# Altium PCB UFC-PCB.PcbDoc
Units mm, origin at the board's own origin, x right, y up, seen from the top; angles counter-clockwise.
Board outline 94.62 x 100 mm, 2 copper layers (Top Layer, Bottom Layer), stack 1.571 mm thick; 29 components, 27 nets, 157 pads, 0 vias.
Unrouted connection lines stored in the file: 39.
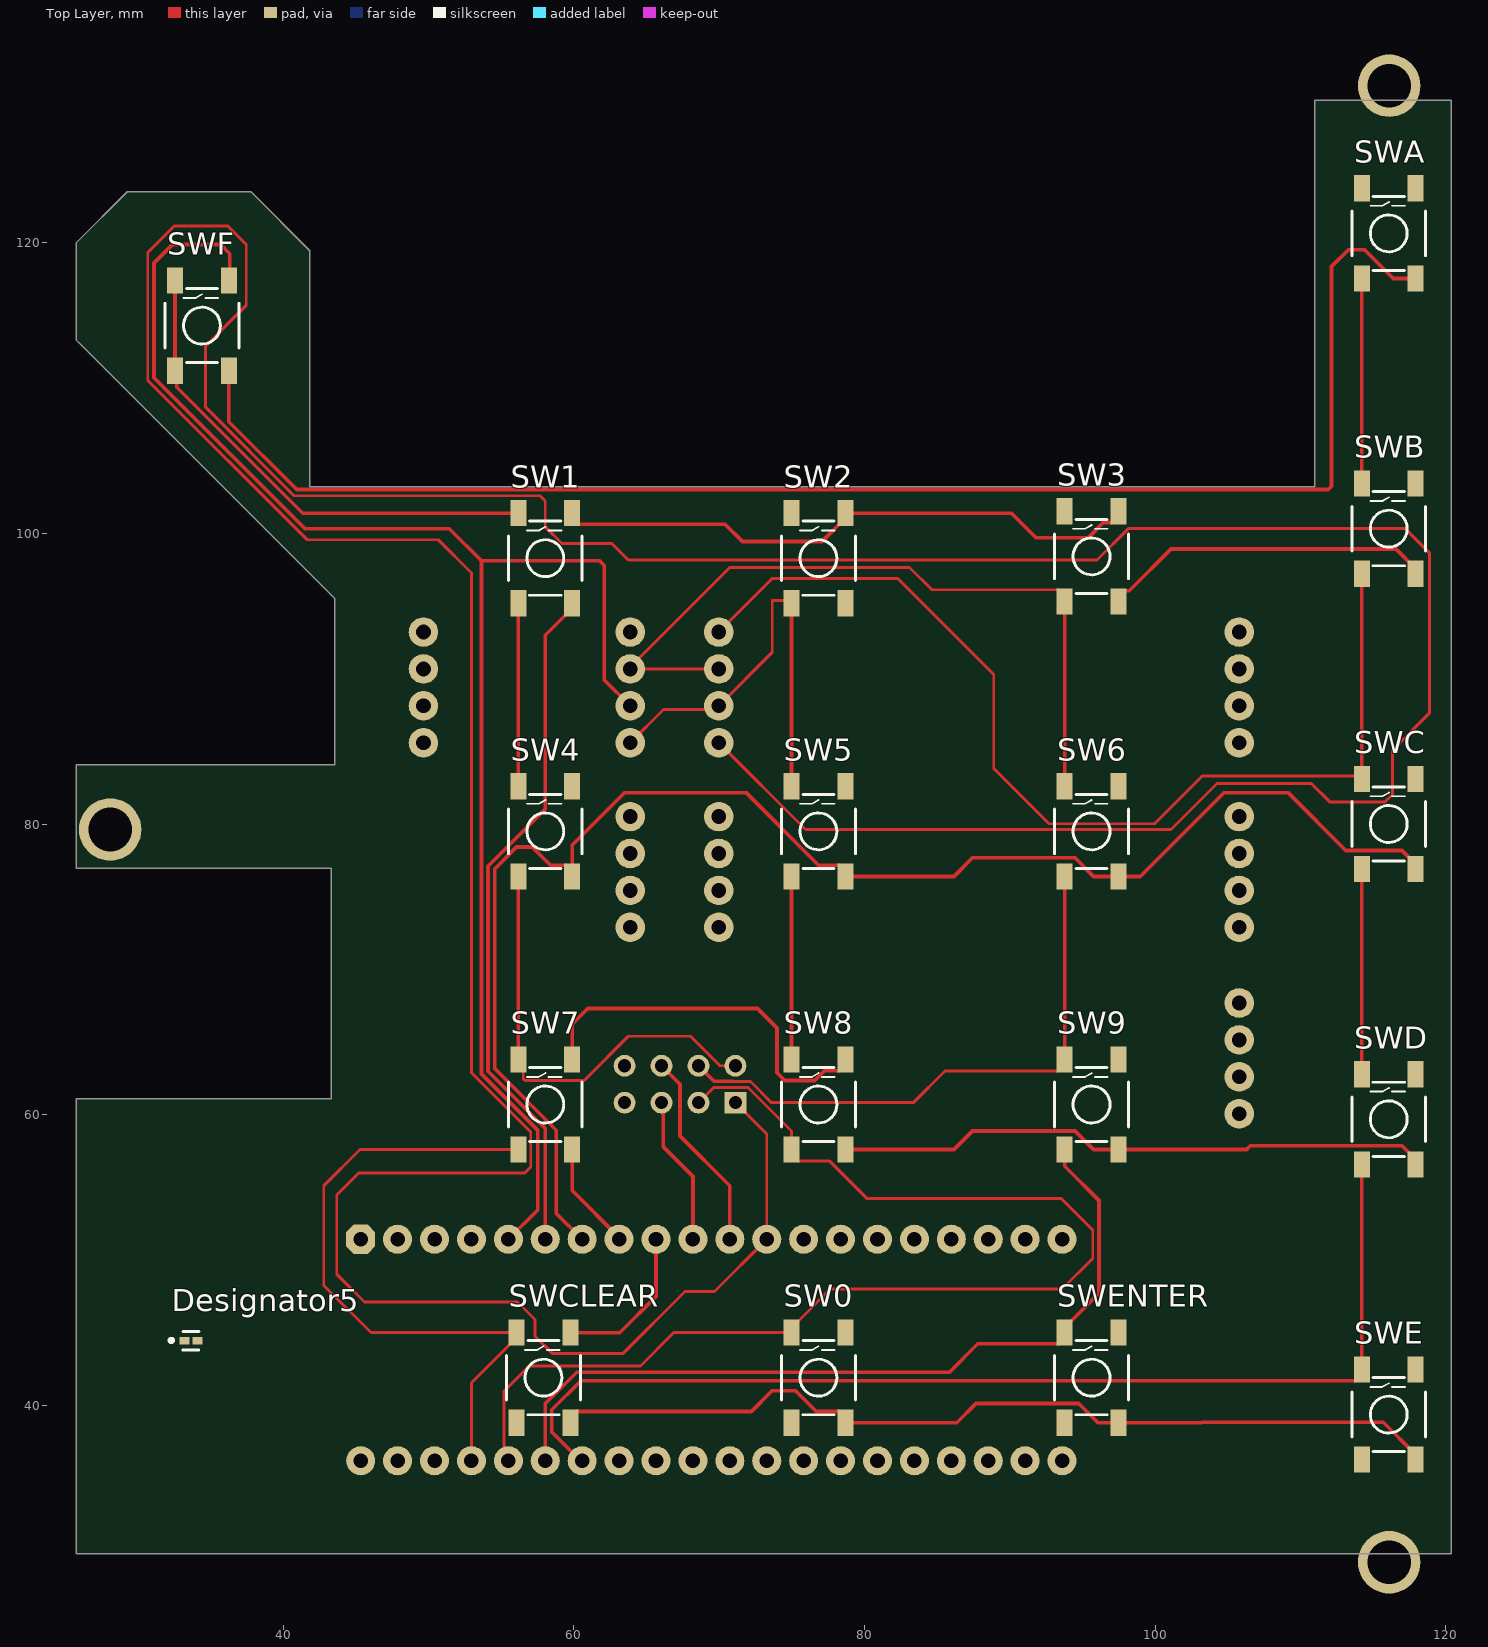
[diagram p0: Top Layer view]
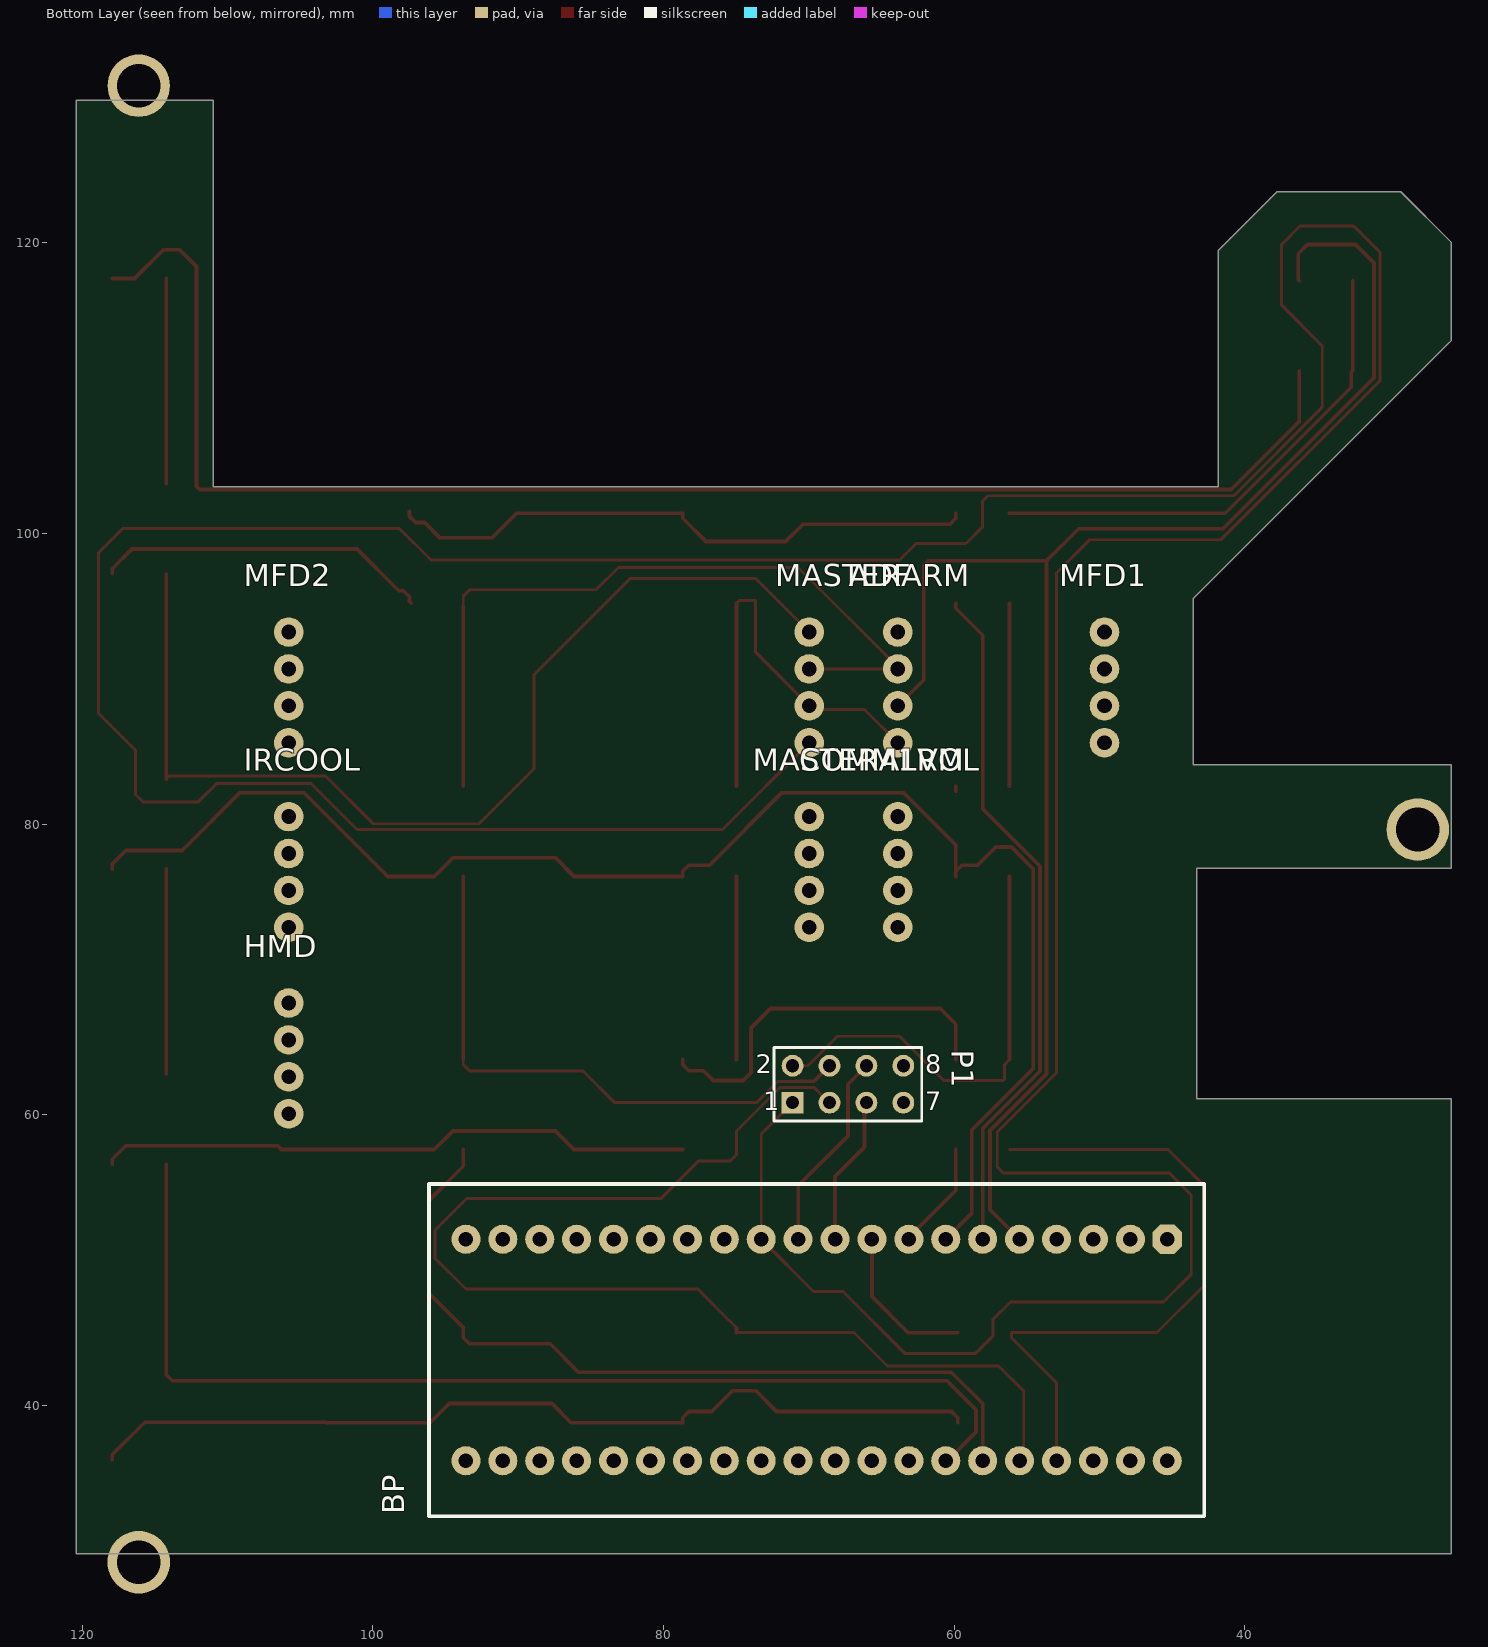
[diagram p1: Bottom Layer view, seen from below]
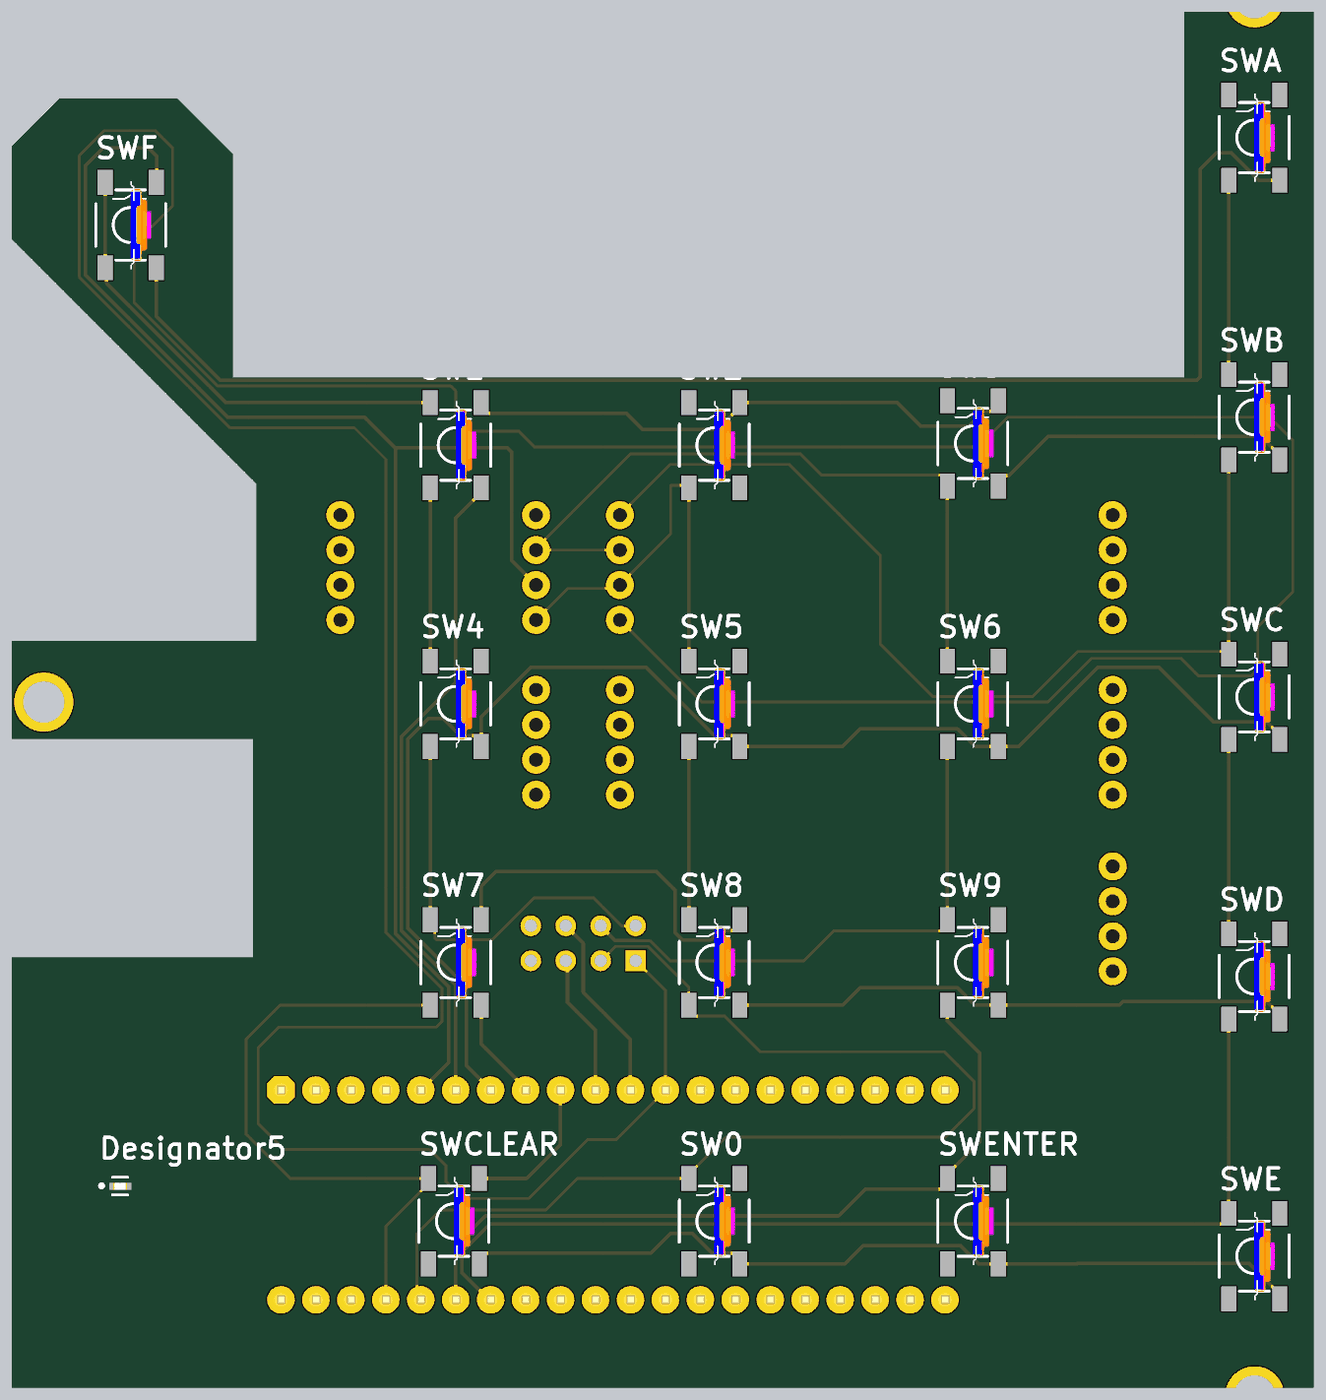
[diagram p2: 3D render of the assembled board from above, using the file's embedded part models]
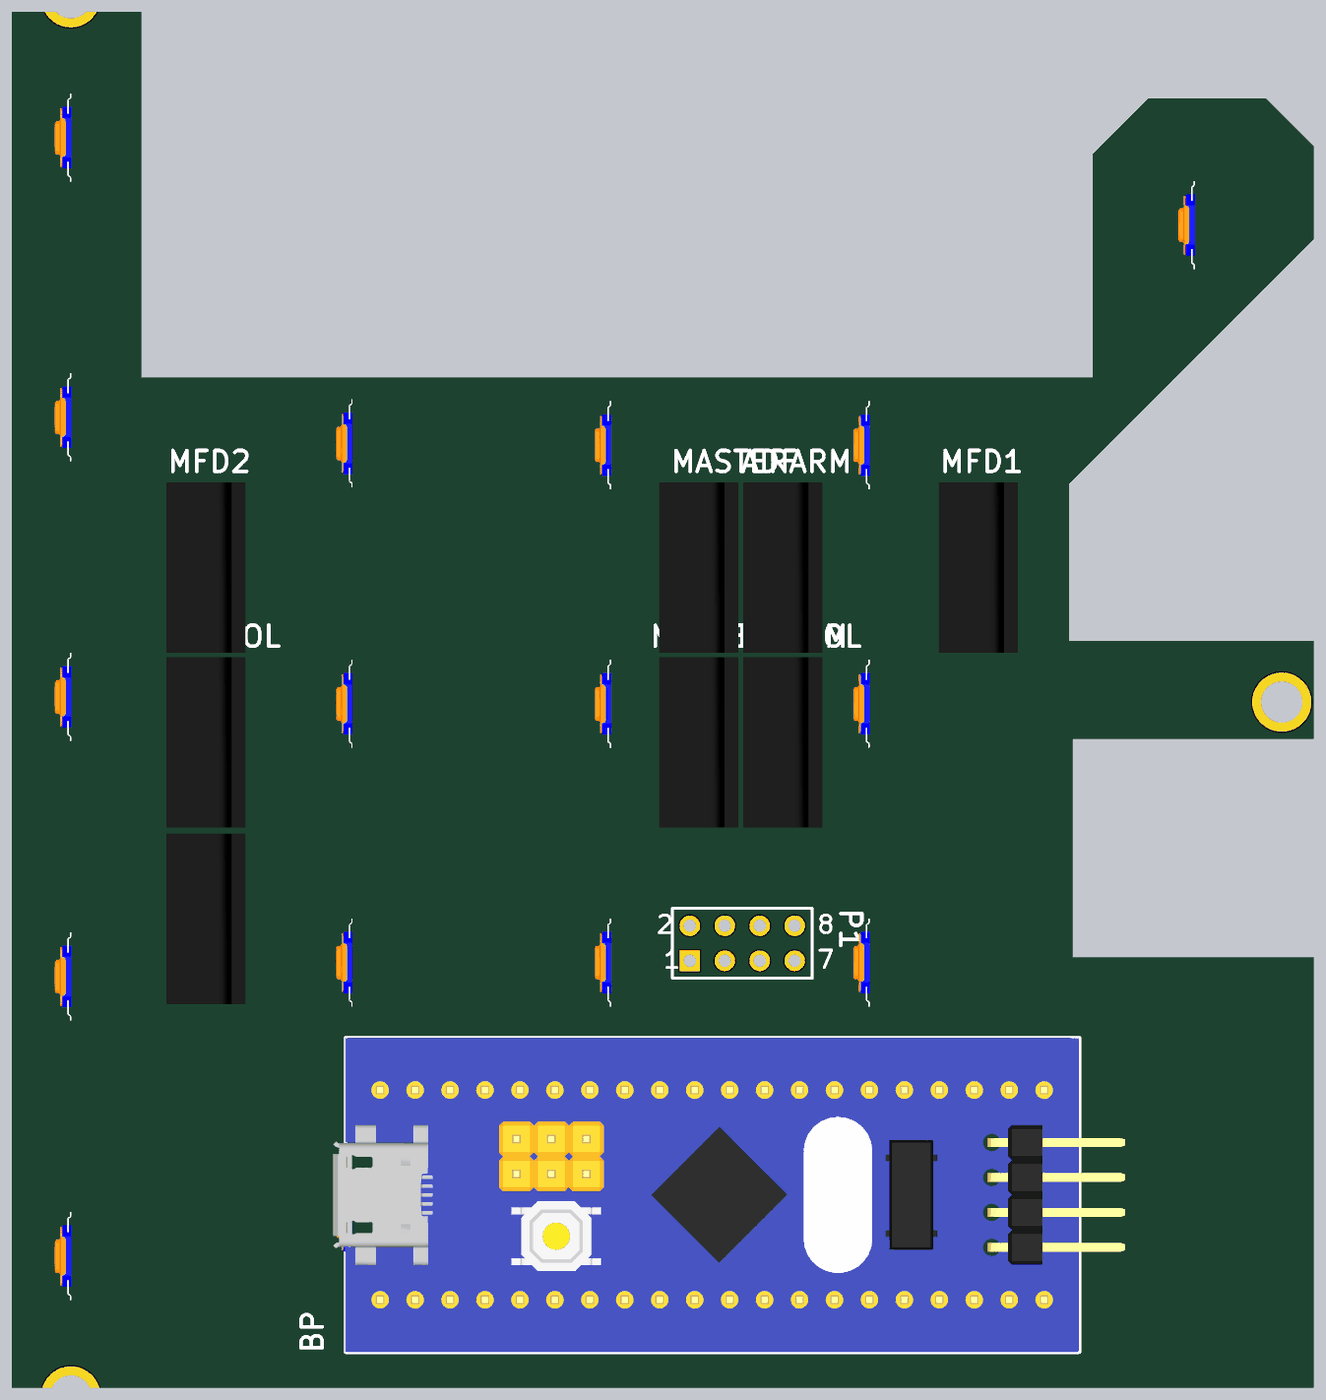
[diagram p3: 3D render of the assembled board from below, using the file's embedded part models]

## Layer stack, top to bottom
Top Solder: solder mask 0.0102, Solder Resist, Dk 3.5
Top Layer: signal copper 0.0356
Dielectric 1: dielectric 1.5, FR-4, Dk 4.8
Bottom Layer: signal copper 0.0356
Bottom Solder: solder mask 0.0102, Solder Resist, Dk 3.5

## Board outline
25.781,29.8 25.781,61.087 43.307,61.087 43.307,76.962 25.781,76.962 25.781,84.074 43.561,84.074 43.561,95.504 26.035,113.03 25.781,113.284 25.781,120.015 29.273,123.507 37.783,123.507 41.839,119.451 41.839,103.203 110.998,103.203 110.998,129.8 120.396,129.8 120.396,29.8

## Design rules (kind name [scope] priority, off if disabled: settings)
Clearance [All] p1: gap=0.2 ignorepadtopadclearanceinfootprint=FALSE
ComponentClearance [IsFree] p1: gap=0 collisioncheckmode=3 verticalgap=0 showdistances=FALSE
ComponentClearance ComponentClearance_1 [All] p2: gap=0.254 collisioncheckmode=3 verticalgap=0.254 showdistances=FALSE
PolygonConnect [All] p1: connectstyle=Relief reliefconductorwidth=0.254 reliefentries=4 polygonreliefangle="90 Angle" airgapwidth=0.254
RoutingVias [All] p1: holewidth=0.711 width=1.27 viastyle="Through Hole" minholewidth=0.711 minwidth=1.27 maxholewidth=0.711 maxwidth=1.27
SolderMaskExpansion [All] p1: expansion=0.102 istentingtop=FALSE
Width [All] p1: maxlimit=0.254 minlimit=0.2 preferedwidth=0.254
29 further rules are at their usual default settings.

## Components (designator, comment, footprint, x,y, rotation, side; value= is the part's Value field where it differs from the comment)
ADF "B4B-XH-A(LF)(SN)" "New footprint 1" 64.389,89.408 r90 bottom
BP "BLUEPILL STM32F103" BLUEPILL-PCB 45.339,51.435 r90 bottom
COMM1VOL "B4B-XH-A(LF)(SN)" "New footprint 1" 64.389,76.708 r90 bottom
Designator5 "Comment" FP-APHHS1005CGCK-MFG 33.655,44.45 r0 top
HMD "B4B-XH-A(LF)(SN)" "New footprint 1" 106.299,63.881 r90 bottom
IRCOOL "B4B-XH-A(LF)(SN)" "New footprint 1" 106.299,76.708 r90 bottom
MASTERALRM "B4B-XH-A(LF)(SN)" "New footprint 1" 70.485,76.708 r90 bottom
MASTERARM "B4B-XH-A(LF)(SN)" "New footprint 1" 70.485,89.408 r90 bottom
MFD1 "B4B-XH-A(LF)(SN)" "New footprint 1" 50.165,89.408 r90 bottom
MFD2 "B4B-XH-A(LF)(SN)" "New footprint 1" 106.299,89.408 r90 bottom
P1 "Header 4X2" HDR2X4 71.12,60.833 r180 bottom
SW0 "95C05B3GWRT" TACTILE-SWITCH-4P 76.835,41.91 r90 top
SW1 "95C05B3GWRT" TACTILE-SWITCH-4P 58.039,98.298 r90 top
SW2 "95C05B3GWRT" TACTILE-SWITCH-4P 76.835,98.298 r90 top
SW3 "95C05B3GWRT" TACTILE-SWITCH-4P 95.631,98.425 r90 top
SW4 "95C05B3GWRT" TACTILE-SWITCH-4P 58.039,79.502 r90 top
SW5 "95C05B3GWRT" TACTILE-SWITCH-4P 76.835,79.502 r90 top
SW6 "95C05B3GWRT" TACTILE-SWITCH-4P 95.631,79.502 r90 top
SW7 "95C05B3GWRT" TACTILE-SWITCH-4P 58.039,60.706 r90 top
SW8 "95C05B3GWRT" TACTILE-SWITCH-4P 76.835,60.706 r90 top
SW9 "95C05B3GWRT" TACTILE-SWITCH-4P 95.631,60.706 r90 top
SWA "95C05B3GWRT" TACTILE-SWITCH-4P 116.078,120.65 r90 top
SWB "95C05B3GWRT" TACTILE-SWITCH-4P 116.078,100.33 r90 top
SWC "95C05B3GWRT" TACTILE-SWITCH-4P 116.078,80.01 r90 top
SWCLEAR "95C05B3GWRT" TACTILE-SWITCH-4P 57.912,41.91 r90 top
SWD "95C05B3GWRT" TACTILE-SWITCH-4P 116.078,59.69 r90 top
SWE "95C05B3GWRT" TACTILE-SWITCH-4P 116.078,39.37 r90 top
SWENTER "95C05B3GWRT" TACTILE-SWITCH-4P 95.631,41.91 r90 top
SWF "95C05B3GWRT" TACTILE-SWITCH-4P 34.417,114.3 r90 top

## Footprints (in the part's own frame and the unit in brackets; to place one, negate y for a bottom-side part, rotate by r counter-clockwise, add the part's x,y. Pads: shape width x height; smd on the part's side, far side on the other; paste and mask are expansions set on the pad)
BLUEPILL-PCB [mm]
  oct 2x2 hole 1: 1(0,0)
  round 2 hole 1: 2(0,2.54) 3(0,5.08) 4(0,7.62) 5(0,10.16) 6(0,12.7) 7(0,15.24) 8(0,17.78) 9(0,20.32) 10(0,22.86) 11(0,25.4) 12(0,27.94) 13(0,30.48) 14(0,33.02) 15(0,35.56) 16(0,38.1) 17(0,40.64) 18(0,43.18) 19(0,45.72) 20(0,48.26) 21(-15.24,48.26) 22(-15.24,45.72) 23(-15.24,43.18) 24(-15.24,40.64) 25(-15.24,38.1) 26(-15.24,35.56) 27(-15.24,33.02) 28(-15.24,30.48) 29(-15.24,27.94) 30(-15.24,25.4) 31(-15.24,22.86) 32(-15.24,20.32) 33(-15.24,17.78) 34(-15.24,15.24) 35(-15.24,12.7) 36(-15.24,10.16) 37(-15.24,7.62) 38(-15.24,5.08) 39(-15.24,2.54) 40(-15.24,0)
  silkscreen extent -19.05,-2.54 3.8,50.8, body extent -19.05,-5.84 12.45,51.72, height 18.27
FP-APHHS1005CGCK-MFG [mm]
  rect 0.7x0.5 smd paste+0 mask+0: 1(-0.45,0) 2(0.45,0)
  silkscreen extent -1.47,-0.63 0.55,0.65, body extent -0.9,-0.4 0.9,0.4, height 0.25
HDR2X4 [mm] "Connector; Header; 4x2 Position"
  rect 1.5x1.5 hole 0.9: 1(0,0)
  round 1.5 hole 0.9: 2(0,2.54) 3(2.54,0) 4(2.54,2.54) 5(5.08,0) 6(5.08,2.54) 7(7.62,0) 8(7.62,2.54)
  silkscreen extent -1.27,-1.27 8.89,3.81
"New footprint 1" [mil]
  round 80 hole 40: 1(-150,-20) 2(-50,-20) 3(50,-20) 4(150,-20)
  body extent -244,-114 244,113, height 276
TACTILE-SWITCH-4P [mm]
  rect 1.8x1.1 smd: 1(-3.1,1.85) 2(-3.1,-1.85) 3(3.1,1.85) 4(3.1,-1.85)
  silkscreen extent -2.55,-2.54 2.55,2.54, body extent -3.2,-2.6 3.2,2.6, height 1.5

## Part data
ADF COMM1VOL HMD IRCOOL MASTERALRM MASTERARM MFD1 MFD2: library part B4B-XH-A(LF)(SN)-1, "JST (JAPAN SOLDERLESS TERMINALS) - B4B-XH-A (LF)(SN) - Wire-To-Board-Steckverbinder, vertikal, 2.5 mm, 4 Kontakt(e), Stiftleiste, Baureihe XH", Color=Natural, Contact Resistance=20mR, Current Rating=3A, Housing Color=White, Insulation Resistance=1GR, Max Operating Temperature=85°C, Max Voltage Rating (AC)=250V, Min Operating Temperature=-25°C, Package Quantity=500, Connector Type="Male Pin", Contact Material=Brass, Contact Plating=Tin,Copper,Lead, Depth=5.75mm, Gender=Male, Housing Material=Polyamide, Lead Free="Lead Free", Lead Pitch=2.5mm, Length=12.4mm, Material=Polyamide, Max Current Rating=3A, Max Voltage Rating (DC)=250V, Mount="Through Hole", Number of Contacts=4, Number of Positions=4, Number of Rows=1, Orientation=Straight, Packaging=Bulk, Pitch=2.5mm, REACH SVHC="No SVHC", Termination=Press-Fit, Voltage Rating=250V, Voltage Rating (AC)=250V, Wire/Cable Gauge=22AWG
BP: library part BLUEPILL-1, "STM32 Blue Pill Development Module"
P1: "Header, 4-Pin, Dual row", LatestRevisionDate=17-Jul-2002, LatestRevisionNote="Re-released for DXP Platform.", Publisher="Altium Limited"
SW0 SW1 SW2 SW3 SW4 SW5 SW6 SW7 SW8 SW9 SWA SWB SWC SWCLEAR SWD SWE SWENTER SWF: library part 95C05B3GWRT-4, "SWITCH TACTILE SPST-NO 0.05A 12V", Cod EMS=05.283.001.096, Part No=95C05B3GWRT

## Free pads (board coordinates)
  round 4.3 hole 3: 1(28.099,79.629) 1(116.11,130.81)
  round 4.305 hole 3: 1(116.11,29.21)

## Nets (pads, with @x,y where several pads share a name; then routed paths per layer and width w, separated by ;. In a path a pad name is that pad's centre, name@x,y a point inside that pad or via, vN(x,y) a via of type N, cw(c..) or ccw(c..) an arc to the next point about the centre after c; other vN are vias at no path point)
3V3: BP.18 BP.40
5V: BP.38
ADC8: BP.13
ADC9: BP.14
C1: BP.37 P1.2 SW1.1 SW1.3 SW4.1 SW4.3 SW7.1 SW7.3 SWCLEAR.1 SWCLEAR.3 SWF.1 SWF.3 | length 123.9
  Top Layer w0.2: BP.37 52.959,41.557 56.062,44.66 SWCLEAR.3 46.049,45.01 42.799,48.26 42.799,55.118 45.287,57.606 SW7.1 ; SW7.3 56.525,63.47 56.525,62.474 56.642,62.357 60.716,62.357 60.833,62.474 60.833,62.484 63.754,65.405 68.033,65.405 70.065,63.373 P1.2
  Top Layer w0.254: SWF.3 SWF.1 32.68,111.087 32.68,110.068 41.35,101.398 SW1.3 ; SW7.3 SW4.1 ; SW4.3 SW1.1
C2: ADF.1 BP.36 MASTERARM.2 P1.3 SW0.1 SW0.3 SW2.1 SW2.3 SW5.1 SW5.3 SW8.1 SW8.3 | length 126.4
  Top Layer w0.2: BP.36 55.212,36.482 55.212,40.988 56.942,42.718 64.592,42.718 66.884,45.01 SW0.3 ; ADF.1 66.167,87.884 69.723,87.884 MASTERARM.2 73.66,91.821 73.66,95.377 74.806,95.377 SW2.1 ; P1.3 69.63,61.883 71.994,61.883 74.985,58.892 SW8.1 74.985,57.256 75.435,56.806 77.611,56.806 80.188,54.229 93.553,54.229 95.712,52.07 95.712,50.119 93.599,48.006 77.652,48.006 75.456,45.81 75.435,45.81 74.985,45.36 SW0.3@74.985,45.339
  Top Layer w0.254: SW0.3 SW0.3@74.985,45.339 ; SW8.3 SW5.1 ; SW5.3 SW2.1
C3: ADF.3 BP.35 MASTERARM.3 P1.4 SW3.1 SW3.3 SW6.1 SW6.3 SW9.1 SW9.3 SWENTER.1 SWENTER.3 | length 149.6
  Top Layer w0.2: MASTERARM.3 ADF.3 63.881,90.805 70.739,97.663 83.107,97.663 84.645,96.125 93.331,96.125 93.781,95.675 SW3.1 SW3.1@93.781,94.975 ; 70.947,62.31 70.974,62.283 72.16,62.283 73.61,60.833 83.361,60.833 85.534,63.006 93.331,63.006 93.781,63.456 SW9.3
  Top Layer w0.254: BP.35 58.039,40.132 60.198,42.291 85.852,42.291 87.798,44.237 93.358,44.237 93.781,44.66 SWENTER.3 93.781,45.36 96.139,47.718 96.139,54.102 93.781,56.46 SW9.1 ; P1.4 69.643,62.31 70.947,62.31 ; SW9.3 SW6.1 ; SW6.3 SW3.1@93.781,94.975
C4: BP.34 MASTERARM.4 SWA.1 SWA.3 SWB.1 SWB.3 SWC.1 SWC.3 SWD.1 SWD.3 SWE.1 SWE.3 | length 176
  Top Layer w0.2: MASTERARM.4 73.66,96.901 82.296,96.901 88.9,90.297 88.9,83.82 92.691,80.029 99.968,80.029 103.251,83.312 114.026,83.312 SWC.3
  Top Layer w0.254: BP.34 60.465,36.195 58.493,38.167 58.493,39.697 60.493,41.697 113.805,41.697 114.228,42.12 SWE.3 SWD.1 ; SWD.3 SWC.1 ; SWC.3 SWB.1 ; SWB.3 SWA.1
C5: BP.27
ENC1A: BP.30
ENC1B: BP.31
ENC2A: BP.32
ENC2B: BP.33
ENC3A: BP.25
ENC3B: BP.26
GND: BP.19 BP.20 BP.39 P1.7
L1: ADF.2 BP.5 SWA.2 SWA.4 SWF.2 SWF.4 | length 215.3
  Top Layer w0.254: SWF.2 36.267,107.689 40.931,103.025 111.915,103.025 112.141,103.251 112.141,118.364 113.306,119.529 114.416,119.529 116.395,117.55 SWA.2 ; SWF.4 36.322,117.455 36.322,119.253 35.687,119.888 32.385,119.888 31.115,118.618 31.115,110.713 41.498,100.33 51.435,100.33 53.648,98.117 ; BP.5 57.531,53.467 57.531,58.921 53.648,62.804 53.648,98.117 ; ADF.2 62.103,89.916 62.103,97.79 61.776,98.117 53.648,98.117
L2: BP.6 SW1.2 SW1.4 SW2.2 SW2.4 SW3.2 SW3.4 SWB.2 SWB.4 | length 112.3
  Top Layer w0.254: BP.6 58.039,59.055 54.102,62.992 54.102,77.107 58.039,81.044 58.039,92.998 59.889,94.848 SW1.2 ; SW1.4 59.889,101.048 60.312,100.625 70.421,100.625 71.605,99.441 77.078,99.441 78.685,101.048 SW2.4 90.118,101.398 91.821,99.695 95.377,99.695 96.434,100.752 97.058,100.752 97.481,101.175 SW3.4 ; SW3.2@97.354,95.198 SW3.2 97.481,95.642 97.904,96.065 98.221,96.065 101.089,98.933 116.575,98.933 117.928,97.58 SWB.2
L3: BP.7 SW4.2 SW4.4 SW5.2 SW5.4 SW6.2 SW6.4 SWC.2 SWC.4 | length 105.1
  Top Layer w0.254: SW4.2 SW4.2@59.889,76.752 ; SW4.4@59.889,82.252 SW4.4 ; BP.7 58.801,53.213 58.801,58.935 54.556,63.18 54.556,76.919 56.065,78.428 57.139,78.428 58.392,77.175 59.466,77.175 SW4.2@59.889,76.752 ; SWC.2 117.928,77.26 116.997,78.191 113.116,78.191 109.138,82.169 104.752,82.169 98.985,76.402 SW6.2 95.77,76.402 94.489,77.683 87.439,77.683 86.158,76.402 SW5.2 78.685,76.752 78.262,77.175 76.843,77.175 71.849,82.169 63.5,82.169 59.889,78.558 SW4.2@59.889,76.752
L4: BP.8 SW7.2 SW7.4 SW8.2 SW8.4 SW9.2 SW9.4 SWD.2 SWD.4 | length 75
  Top Layer w0.254: SW7.2 59.889,54.792 63.119,51.562 BP.8 ; SW7.4 59.889,66.239 60.96,67.31 72.644,67.31 73.98,65.974 73.98,62.899 74.522,62.357 76.581,62.357 77.257,63.033 78.262,63.033 78.685,63.456 SW8.4 ; SW8.2 86.158,57.606 87.439,58.887 94.489,58.887 95.77,57.606 SW9.2 106.287,57.606 106.552,57.871 116.997,57.871 117.928,56.94 SWD.2
L5: BP.9 SW0.2 SW0.4 SWCLEAR.2 SWCLEAR.4 SWE.2 SWE.4 SWENTER.2 SWENTER.4 | length 73.7
  Top Layer w0.254: SWCLEAR.2 59.762,39.16 60.185,39.583 72.222,39.583 73.66,41.021 75.242,41.021 76.68,39.583 78.262,39.583 78.685,39.16 SW0.2 86.36,38.81 87.682,40.132 94.742,40.132 96.064,38.81 SWENTER.2 103.205,38.81 103.245,38.85 115.698,38.85 117.928,36.62 SWE.2 ; SWCLEAR.4 63.171,45.01 65.659,47.498 BP.9
L6: BP.10 P1.5 | length 10.3
  Top Layer w0.254: P1.5 66.167,60.706 66.167,57.785 68.199,55.753 BP.10
L7: BP.11 P1.6 | length 13.9
  Top Layer w0.254: P1.6 67.31,62.103 67.31,58.547 70.739,55.118 BP.11
L8: BP.12 MASTERARM.1 P1.1 | length 325
  Top Layer w0.2: MASTERARM.1 75.946,79.629 101.092,79.629 104.267,82.804 110.744,82.804 112.014,81.534 115.824,81.534 116.332,82.042 116.332,85.09 118.872,87.63 118.872,98.679 117.221,100.33 98.16,100.33 96.001,98.171 63.754,98.171 62.611,99.314 59.182,99.314 58.039,100.457 58.039,102.235 57.676,102.598 40.754,102.598 34.671,108.681 34.671,112.903 37.465,115.697 37.465,119.888 36.195,121.158 32.512,121.158 30.688,119.334 30.688,110.536 41.656,99.568 50.673,99.568 52.959,97.282 52.959,62.889 57.039,58.809 57.039,56.404 56.642,56.007 45.212,56.007 43.688,54.483 43.688,49.022 45.593,47.117 56.134,47.117 57.34,45.91 57.34,44.767 58.547,43.561 63.373,43.561 67.646,47.834 69.678,47.834 BP.12 73.279,58.674 P1.1
USB+: BP.29
USB-: BP.28
VCC: P1.8
pads on no net: ADF.4 BP.1 BP.2 BP.3 BP.4 BP.15 BP.16 BP.17 BP.21 BP.22 BP.23 BP.24 COMM1VOL.1 COMM1VOL.2 COMM1VOL.3 COMM1VOL.4 Designator5.1 Designator5.2 HMD.1 HMD.2 HMD.3 HMD.4 IRCOOL.1 IRCOOL.2 IRCOOL.3 IRCOOL.4 MASTERALRM.1 MASTERALRM.2 MASTERALRM.3 MASTERALRM.4 MFD1.1 MFD1.2 MFD1.3 MFD1.4 MFD2.1 MFD2.2 MFD2.3 MFD2.4

## Silkscreen, mask and mechanical layers (free items; w line width, h text height)
Mechanical 1:
  the board outline again, w0.2

## Text inside footprints (layer, text, board x,y; h text height)
P1: Bottom Overlay "2" at 73.66,62.865 h1.27; Bottom Overlay "1" at 73.152,60.325 h1.27; Bottom Overlay "7" at 61.976,60.325 h1.27; Bottom Overlay "8" at 61.976,62.865 h1.27